# Altium PCB PCB_DCMotor.PcbDoc (part 2 of 2)
Units mm, origin at the board's own origin, x right, y up, seen from the top; angles counter-clockwise.
Board outline 135.2 x 115 mm, 2 copper layers (Top Layer, Bottom Layer); 232 components, 119 nets, 709 pads, 158 vias.
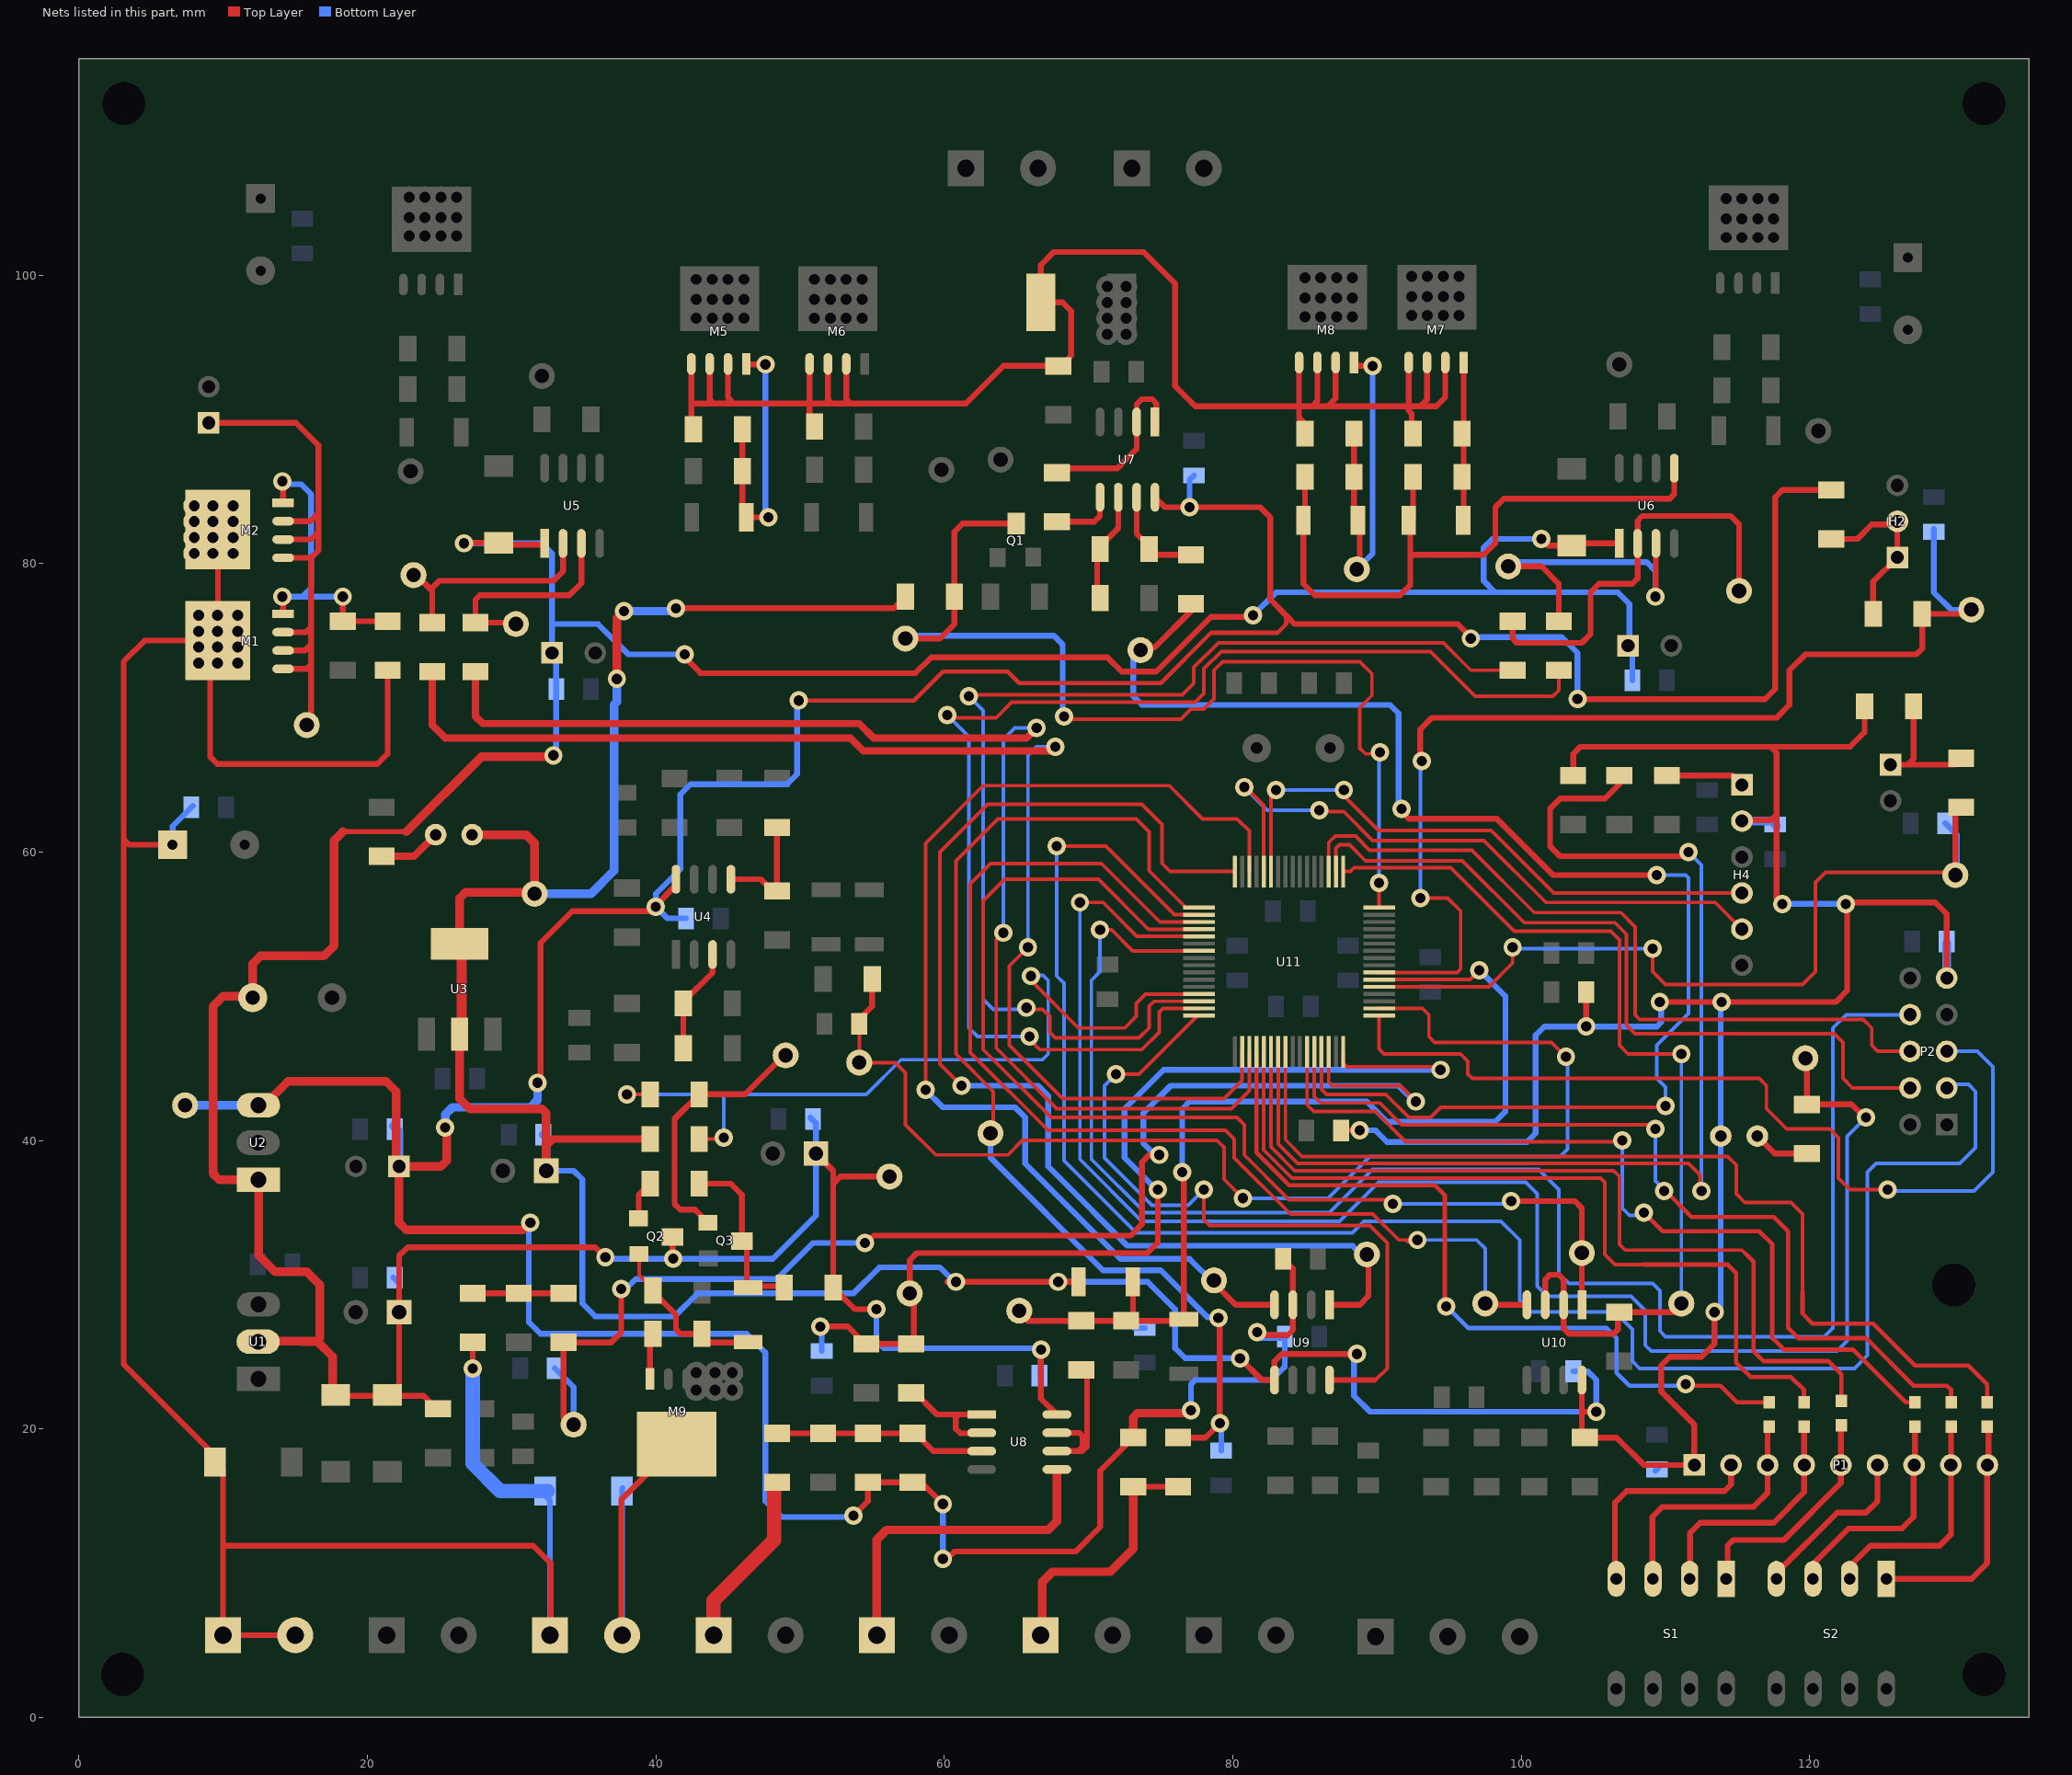
[diagram p2: the nets of this part, all layers, seen from the top]

## Via types
v1: diameter 1.27, hole 0.711, Top Layer to Bottom Layer, 158 vias

## Nets (pads, with @x,y where several pads share a name; then routed paths per layer and width w, separated by ;. In a path a pad name is that pad's centre, name@x,y a point inside that pad or via, vN(x,y) a via of type N, cw(c..) or ccw(c..) an arc to the next point about the centre after c; other vN are vias at no path point) (continued)
NetD11_1: D11.1 M8.4 R19.1 R28.2 T11.1 | length 26
  Top Layer w0.4: R28.2@88.399,89 R19.1@88.399,86 88.399,83.101 88.8,82.7 88.8,80 T11.1@88.4,79.6 ; M8.4@88.405,93.939 88.644,93.7 v1(89.7,93.7)
  Bottom Layer w0.4: T11.1@88.4,79.4 89.7,80.7 v1(89.7,93.7)
NetD11_2: D11.2 D12.2 R19.2 R26.2 U6.5 | length 47.3
  Top Layer w0.4: D11.2@84.898,83 84.898,78.602 85.7,77.8 91.6,77.8 92.3,78.5 92.3,80.6 ; D11.2@84.9,82.7 85.001,82.801 R19.2@85.001,86 ; D12.2@92,82.6 D12.2@92.3,82.9 ; D12.2@92.3,83.1 D12.2@92.3,82.9 ; R26.2@92.501,86 92.501,83.101 D12.2@92.3,82.9 ; U6.5@110.605,86.607 110.605,84.805 110.3,84.5 98.8,84.5 98.2,83.9 98.2,81.4 97.4,80.6 92.3,80.6 ; 92.3,80.6 D12.2@92.3,82.9
NetD12_1: D12.1 M7.4 R26.1 R27.2 | length 11.2
  Top Layer w0.4: D12.1@95.9,82.8 96,82.8 96.005,82.805 M7.4@96.005,93.939
NetD13_1: D13.1 M5.4 R25.1 R29.2 | length 19.5
  Top Layer w0.4: R29.2@45.999,89.3 R25.1@45.999,86.4 45.999,83.701 D13.1@46.4,83.3 ; M5.4@46.27,93.839 46.309,93.8 v1(47.6,93.8) ; D13.1@46.277,83.2 v1(47.8,83.2)
  Bottom Layer w0.4: v1@47.6,83.3 v1(47.6,93.8)
NetD16_1: D16.1 J10.2 M9.5 | length 25.2
  Top Layer w0.4: J10.2@37.6,5.5 37.6,15.09 M9.5@41.449,18.939
  Bottom Layer w0.4: J10.2@37.667,5.7 37.667,15.867 D16.1@37.7,15.9
NetD17_1: D17.1 Q2.2 R74.2 R76.1 | length 11.9
  Top Layer w0.25: Q2.2@38.833,32.132 38.833,30.667 R76.1@39.9,29.6 ; R76.1@39.8,29.5 R76.1@39.9,29.5
  Top Layer w0.4: R76.1@39.8,29.5 41.4,27.9 41.4,26.9 41.7,26.6 R74.2@43.199,26.6 43.799,26 D17.1@46.6,26
NetD17_2: D17.2 Q3.3 R78.2 R79.1 | length 12.4
  Top Layer w0.4: R79.1@42.999,37 45.2,37 45.963,36.237 Q3.3@45.963,33.018 46.3,32.68 46.3,29.9 R78.2@48.9,29.9
NetH1_1: H1.1 M1.1 M1.2 M1.3 M2.1 M2.2 M2.3 T5.1 | length 42
  Top Layer w0.4: H1.1@9,89.75 15.05,89.75 16.6,88.2 16.6,83.7 ; M1.1@14.161,72.695 15.795,72.695 16.1,73 ; M1.2@14.161,73.965 15.665,73.965 16.1,74.4 ; M1.3@14.161,75.235 15.735,75.235 16.1,75.6 ; M2.1@14.161,80.395 16,80.395 ; M2.2@14.161,81.665 16.065,81.665 16.6,82.2 ; M2.3@14.161,82.935 16.035,82.935 16.6,83.5 ; T5.1@15.6,68.6 16.1,69.1 16.1,73 ; 16,80.395 16.1,80.295 16.1,75.6 ; 16,80.395 16.095,80.395 16.6,80.9 16.6,82.2 ; 16.1,73 16.1,74.4 ; 16.1,74.4 16.1,75.6 ; 16.6,82.2 16.6,83.5 ; 16.6,83.5 16.6,83.7 ; 16.6,83.5 16.6,83.7
NetH2_1: H2.1 H2.2 R39.1 R43.2 | length 12.6
  Top Layer w0.4: R39.1@121.5,81.701 123.301,81.701 124.3,82.7 126,82.7 H2.2@126.2,82.9 ; R43.2@124.401,76.5 124.401,78.746 H2.1@126.075,80.42 126.075,82.875 H2.2@126.3,83.1
NetH3_1: H3.1 R42.1 R45.2 | length 9.5
  Top Layer w0.4: H3.1@125.6,66.05 126.8,66.05 ; R42.1@127.199,70.1 127.199,66.449 126.8,66.05 ; R45.2@130.7,66.6 130.15,66.05 126.8,66.05
NetH4_1: H4.1 R69.2 | length 5.5
  Top Layer w0.4: R69.2@110.1,65.299 114.651,65.299 H4.1@115.3,64.65
NetJ5_1: J5.1 R41.2 R44.2 | length 18.7
  Top Layer w0.4: R41.2@73.1,16.001 R44.2@76.2,16.001 R44.2@76.599,16.001
  Top Layer w0.6: J5.1@66.6,5.8 66.8,6 66.8,9.4 67.5,10.1 71.5,10.1 73.1,11.7 R41.2@73.1,16.001
NetJ6_1: J6.1 R51.2 | length 12.4
  Top Layer w1: J6.1@44,5.7 44,8.1 48.2,12.3 48.2,15.9 R51.2@48.5,16.2
NetJ7_1: J7.1 U8.5 | length 23.3
  Top Layer w0.6: J7.1@55.1,5.7 55.3,5.9 55.3,12.3 56,13 67.2,13 67.807,13.607 U8.5@67.807,17.195
NetLD1_2: LD1.2 R71.1 | length 4.4
  Top Layer w0.5: R71.1@21,59.701 23.231,59.701 LD1.2@24.73,61.2
NetLD2_2: LD2.2 R72.1 | length 3.9
  Top Layer w0.4: LD2.2@116.37,40.3 117.569,39.101 R72.1@119.8,39.101
NetM1_4: M1.4 M2.4 R13.2 R14.1 | length 22.2
  Top Layer w0.4: v1(14.1,77.7) 14.161,77.639 M1.4@14.161,76.505 ; v1(14.1,85.7) 14.161,85.639 M2.4@14.161,84.205 ; R14.1@18.3,75.9 R14.1@18.3,75.999 ; v1(18.3,77.7) R14.1@18.3,75.999 ; R13.2@21.4,75.999 R14.1@18.3,75.999
  Bottom Layer w0.4: v1@13.9,85.8 14,85.8 14.3,85.5 15.4,85.5 16.1,84.8 16.1,78.3 15.5,77.7 ; v1(14.1,77.7) 15.1,77.7 ; v1(18.3,77.7) 15.5,77.7 ; 15.1,77.7 15.5,77.7 ; 15.1,77.7 15.5,77.7
NetM5_1: M5.1 M5.2 M5.3 M6.1 M6.2 M6.3 M7.1 M7.2 M7.3 M8.1 M8.2 M8.3 R27.1 R28.1 R29.1 R30.1 R31.2 R34.2 | length 116
  Top Layer w0.4: M5.1@42.46,93.839 42.46,91.1 ; R29.1@42.601,89.3 42.46,89.441 42.46,91.1 ; M5.2@43.73,93.839 43.73,91.37 44,91.1 ; M5.3@45,93.839 45,91.5 45.2,91.3 ; M6.1@50.66,93.839 50.66,91.1 ; R30.1@51.2,89.7 50.66,90.24 50.66,91.1 ; M6.2@51.93,93.839 51.93,91.37 52.2,91.1 ; M6.3@53.2,93.839 53.2,91.4 53.5,91.1 ; R31.2@67.9,93.5 68.8,94.4 68.8,97.5 68.2,98.1 R34.2@66.7,98.1 66.7,100.7 67.6,101.6 73.8,101.6 76,99.4 76,92.3 77.4,90.9 84.595,90.9 ; R31.2@67.9,93.699 64.099,93.699 61.5,91.1 53.5,91.1 ; M8.1@84.595,93.939 84.595,90.9 ; R28.1@85.3,88.9 85.1,89.1 85.1,89.6 84.595,90.105 84.595,90.9 ; M8.2@85.865,93.939 85.865,91.265 85.5,90.9 ; M8.3@87.135,93.939 87.135,91.435 86.6,90.9 ; M7.1@92.195,93.939 92.195,90.9 ; R27.1@92.4,89 92.4,90.4 92.195,90.605 92.195,90.9 ; M7.2@93.465,93.939 93.465,91.365 93,90.9 ; M7.3@94.735,93.939 94.735,91.535 94.1,90.9 93,90.9 ; 42.46,91.1 44,91.1 ; 44,91.1 50.66,91.1 ; 50.66,91.1 52.2,91.1 ; 52.2,91.1 53.5,91.1 ; 84.595,90.9 85.5,90.9 ; 85.5,90.9 86.6,90.9 ; 86.6,90.9 91.7,90.9 ; 91.7,90.9 91.9,90.9 ; 91.7,90.9 91.9,90.9 ; 91.9,90.9 92.1,90.9 ; 92.1,90.9 92.195,90.9 ; 92.1,90.9 92.195,90.9 ; 92.195,90.9 93,90.9
NetM9_4: M9.4 R74.1 | length 3.1
  Top Layer w0.4: M9.4@39.595,23.461 39.595,26.295 R74.1@39.8,26.5
NetP1_2: P1.2 S1.4 | length 15.5
  Top Layer w0.4: S1.4@106.5,9.3 106.5,14.9 107.3,15.7 114.1,15.7 114.54,16.14 P1.2@114.54,17.5
NetP1_3: P1.3 R53.2 S1.3 | length 17.7
  Top Layer w0.4: S1.3@109.1,9.5 109.1,13.9 109.8,14.6 116.1,14.6 117.08,15.58 P1.3@117.08,17.5 117.08,20.034 R53.2@117.2,20.154
NetP1_4: P1.4 R56.2 S1.2 | length 17.2
  Top Layer w0.4: S1.2@111.7,9.3 111.7,12.8 112.4,13.5 117.5,13.5 119.62,15.62 P1.4@119.62,17.5 119.62,20.08 R56.2@119.5,20.2
NetP1_5: P1.5 R59.2 S1.1 | length 16.5
  Top Layer w0.4: S1.1@114.3,9.3 114.3,11.9 114.7,12.3 118.2,12.3 122.16,16.26 P1.5@122.16,17.5 R59.2@122.16,20.46
NetP1_6: P1.6 S2.4 | length 12
  Top Layer w0.4: S2.4@117.8,9.5 117.8,10.1 121.9,14.2 123.9,14.2 124.7,15 P1.6@124.7,17.5
NetP1_7: P1.7 R50.2 S2.3 | length 15.8
  Top Layer w0.4: S2.3@120.23,9.61 120.23,10.63 122.7,13.1 126.4,13.1 127.2,13.9 127.2,17.6 127.3,17.7 127.3,20.2 R50.2@127.2,20.3
NetP1_8: P1.8 R49.2 S2.2 | length 16.4
  Top Layer w0.4: S2.2@122.77,9.61 122.77,10.47 124.2,11.9 129,11.9 129.8,12.7 R49.2@129.8,20.3
NetP1_9: P1.9 R48.2 S2.1 | length 17.2
  Top Layer w0.4: S2.1@125.31,9.61 131.21,9.61 132.3,10.7 132.3,17.6 132.4,17.7 132.4,20.3 R48.2@132.3,20.4
NetQ2_1: Q2.1 R79.2 | length 2.9
  Top Layer w0.4: Q2.1@38.808,34.605 38.808,36.208 R79.2@39.7,37.1
NetQ3_1: Q3.1 R75.2 T37.1 | length 18.5
  Top Layer w0.4: Q3.1@43.608,34.305 42.713,35.2 41.7,35.2 41.3,35.6 41.3,41.501 R75.2@42.999,43.2 46.2,43.2 T37.1@49.1,46.1
NetR4_1: R4.1 R6.1 U4.5 | length 7.9
  Top Layer w0.4: U4.5@45.205,58.107 47.293,58.107 R4.1@48.2,57.2 ; R4.1@48.4,57.2 R6.1@48.4,61.701
NetR5_2: R5.2 R7.2 U4.3 | length 7.7
  Top Layer w0.4: R7.2@41.9,46.2 41.8,46.2 41.901,46.301 R5.2@41.901,49.5 41.901,49.601 43.935,51.635 U4.3@43.935,52.893
NetR21_1: R21.1 T12.1 U5.2 | length 15.7
  Top Layer w0.4: T12.1@23.3,79.3 24.5,78.1 ; R21.1@24.6,75.8 R21.1@24.5,75.899 24.5,78.1 ; U5.2@33.565,81.393 33.565,79.465 32.9,78.8 25,78.8 24.5,78.3 24.5,78.1
NetR22_1: R22.1 T13.1 U5.3 | length 15.1
  Top Layer w0.4: T13.1@30.4,75.7 30.201,75.899 R22.1@27.5,75.899 27.5,77.5 27.8,77.8 34,77.8 34.835,78.635 U5.3@34.835,81.393
NetR23_1: R23.1 T14.1 U6.2 | length 29.6
  Top Layer w0.4: R23.1@99.4,75.999 99.4,74.8 99.7,74.5 104.2,74.5 104.8,75.1 104.8,78 105.4,78.6 107.7,78.6 108.065,78.965 U6.2@108.065,81.393 108.065,82.965 108.4,83.3 114.5,83.3 115.1,82.7 T14.1@115.1,78.1
NetR24_1: R24.1 T15.1 U6.3 | length 24.8
  Top Layer w0.4: T15.1@99.1,79.8 101.4,79.8 102.6,78.6 R24.1@102.6,75.999 ; v1(109.3,77.7) 109.335,77.735 U6.3@109.335,81.393 109.335,79.135
  Bottom Layer w0.4: T15.1@99.1,80.1 108.7,80.1 109.3,79.5 v1(109.3,77.7)
NetR32_1: R32.1 U7.5 | length 4.4
  Top Layer w0.4: R32.1@67.9,82.901 70.401,82.901 70.795,83.295 U7.5@70.795,84.593
NetR32_2: R32.2 U7.1 U7.2 | length 12.9
  Top Layer w0.4: R32.2@67.7,86.6 72,86.6 73.335,87.935 U7.2@73.335,89.807 73.335,91.035 73.7,91.4 74.4,91.4 74.7,91.1 74.7,89.3 U7.1@74.6,89.2
NetR33_2: R33.2 R35.1 U7.7 | length 7.2
  Top Layer w0.4: U7.7@73.335,84.593 73.335,82.065 74.8,80.6 R33.2@77.4,80.6
NetR35_2: R35.2 R37.2 U7.6 | length 7.8
  Top Layer w0.4: R37.2@71.1,77.6 70.6,78.1 70.6,81 72.065,82.465 U7.6@72.065,84.593
NetR40_1: R40.1 R46.2 R47.1 | length 6.5
  Top Layer w0.4: R40.1@27.3,29.399 R47.1@30.5,29.399 R46.2@33.6,29.399 R46.2@33.699,29.399 ; R46.2@33.7,29.4 R46.2@33.8,29.4
NetR51_1: R51.1 R52.2 R54.2 R57.2 U8.3 | length 14.9
  Top Layer w0.4: R51.1@48.4,19.699 R57.2@51.6,19.699 R54.2@54.7,19.699 R52.2@57.8,19.699 R52.2@58,19.699 ; R52.2@58.2,19.6 58.101,19.699 R52.2@58,19.699 ; U8.3@62.593,18.465 59.234,18.465 R52.2@58,19.699
NetR55_2: R55.2 U8.1 U8.2 | length 8.5
  Top Layer w0.4: R55.2@57.8,22.7 59.495,21.005 61.005,21.005 ; U8.2@62.593,19.7 61.1,19.7 60.8,20 60.8,20.8 61.005,21.005 ; U8.1@62.593,21.005 61.005,21.005
NetR60_2: R60.2 U8.6 U8.7 | length 10.9
  Top Layer w0.4: U8.6@67.807,18.465 69.265,18.465 ; U8.7@67.807,19.735 69.365,19.735 69.6,19.5 69.6,18.8 69.265,18.465 ; R60.2@69.6,24.2 69.7,24.2 69.9,24 69.9,18.8 69.565,18.465 69.265,18.465
NetR73_1: R73.1 U11.7 | length 80.5
  Top Layer w0.25: U11.7@83.15,46.15 83.15,39.75 83.8,39.1 84.5,38.4 111.6,38.4 112.4,37.6 v1@112.4,36.4
  Top Layer w0.4: R73.1@106.8,65.299 106.8,64.7 105.8,63.7 102.7,63.7 102,63 102,60.4 102.7,59.7 111.3,59.7 v1(111.6,60)
  Bottom Layer w0.25: v1@111.5,60.1 v1(111.6,60) 112.5,59.1 112.5,57.6 v1(112.5,36.5)
PGC: H4.5 U11.44 | length 45
  Top Layer w0.25: v1@80.9,64.5 82.15,63.25 U11.44@82.15,58.65 ; v1(86,62.9) 86.1,62.8 87.7,62.8 89.7,60.8 97.4,60.8 101.7,56.5 113.45,56.5 H4.5@115.3,54.65
  Bottom Layer w0.25: v1(80.8,64.5) 82.4,62.9 v1(86,62.9) v1@86.1,62.9
PGD: H4.4 U11.43 | length 41.6
  Top Layer w0.25: U11.43@82.65,58.65 82.65,63.95 v1(83,64.3) ; v1@87.5,64.3 87.5,64.1 90.1,61.5 97.9,61.5 98.1,61.3 102.25,57.15 H4.4@115.3,57.15 ; v1@87.75,64.35 v1@87.9,64.2
  Bottom Layer w0.25: v1(83,64.3) v1(87.7,64.3)
RST: P2.8 U11.55 | length 118.8
  Top Layer w0.2: 73.45,53.15 U11.55@77.65,53.15
  Top Layer w0.25: v1@70.6,54.6 v1(70.8,54.6) 71.6,54.6 73.05,53.15 U11.55@77.65,53.15
  Bottom Layer w0.25: v1(70.8,54.6) 70.8,51.7 70.2,51.1 70.2,38.7 73.9,35 86.7,35 89.7,38 101.2,38 102.6,36.6 102.6,30.8 103.3,30.1 109.1,30.1 109.609,29.591 109.609,26.791 110,26.4 121,26.4 121.6,27 121.6,30.9 121.6,47.8 122.52,48.72 P2.8@126.96,48.72
SCK: P2.6 U11.35 | length 53.2
  Top Layer w0.25: U11.35@86.65,58.65 86.65,60.65 87.1,61.1 88.5,61.1 89.482,60.118 96.582,60.118 100.9,55.8 106.9,55.8 107.9,54.8 107.9,48.7 108.2,48.4 120.7,48.4 123.7,48.4 124.3,47.8 124.3,46.6 124.7,46.2 126.9,46.2 P2.6@127.1,46
SI: P2.5 U11.17 | length 63.6
  Top Layer w0.25: U11.17@90.15,48.65 90.15,46.35 90.5,46 95.8,46 96.3,45.5 96.3,44.6 96.6,44.3 116.5,44.3 117,43.8 117,42.2 118.4,40.8 121.4,40.8 122,40.2 122,37.4 122.8,36.6 v1(125.4,36.6)
  Bottom Layer w0.25: v1@125.3,36.5 131.4,36.5 132.7,37.8 132.7,45.1 131.62,46.18 P2.5@129.5,46.18
SO: P2.4 U11.34 | length 53.7
  Top Layer w0.25: U11.34@87.15,58.65 87.15,60.25 87.4,60.5 88.1,60.5 89.2,59.4 95.9,59.4 100.2,55.1 106.5,55.1 107.3,54.3 107.3,48 107.9,47.4 121.7,47.4 122.3,46.8 122.3,44.3 122.96,43.64 P2.4@126.96,43.64
UC_BACK_EMF: C11.1 R9.2 T4.1 U11.18 | length 86.4
  Top Layer w0.25: T4.1@54,45.3 54.102,45.402 C11.1@54.102,48.1 ; T4.1@54.1,45.4 56.6,45.4 57.3,44.7 57.3,41.1 59.4,39 64.4,39 65.4,40 78.9,40 79.388,39.512 79.388,37.312 v1(80.7,36) ; U11.18@90.15,49.15 93.15,49.15 93.6,48.7 93.6,47.2 94,46.8 97.1,46.8 102.1,46.8 v1(103.1,45.8)
  Top Layer w0.4: C11.1@54,48.3 54.999,49.299 R9.2@54.999,51.2
  Bottom Layer w0.25: v1(80.7,36) 86.6,36 89.5,38.9 102.7,38.9 103.2,39.4 103.2,45.7 v1(103.1,45.8)
UC_BUS_CURRENT: R33.1 T17.1 U11.13 | length 103.9
  Top Layer w0.25: U11.13@86.15,46.15 86.15,43.55 86.5,43.2 90.6,43.2 92.2,41.6 93.7,41.6 94.4,42.3 109.9,42.3 v1@110,42.2
  Top Layer w0.4: T17.1@73.1,74.2 74.6,74.2 77.1,76.7 R33.1@77.1,77.201 ; v1@91.5,63 92.2,62.3 98.3,62.3 102.2,58.4 v1(109.4,58.4)
  Bottom Layer w0.25: v1(109.4,58.4) 111.4,58.4 111.6,58.2 111.6,54.5 ; v1(110,42.4) 110,43.7 109.4,44.3 109.4,46.6 111.6,48.8 111.6,54.5 ; 111.6,57.1 111.6,54.5
  Bottom Layer w0.4: T17.1@73.3,74.2 73.1,74 73.1,70.8 73.7,70.2 90.9,70.2 91.5,69.6 v1@91.5,62.9
  other v1: 91.7,63
UC_CAN_RXD: T32.1 U9.4 U11.46 | length 77.6
  Top Layer w0.25: v1@58.7,43.4 v1(58.7,43.5) 58.7,60.6 62.7,64.6 75.6,64.6 77.9,62.3 80.3,62.3 81.15,61.45 U11.46@81.15,58.65
  Top Layer w0.4: T32.1@78.7,30.1 80.193,28.607 U9.4@82.895,28.607
  Bottom Layer w0.4: v1(58.7,43.5) 59.9,42.3 64.9,42.3 65.6,41.6 65.6,38.4 67.2,36.8 72.2,31.8 77,31.8 T32.1@78.7,30.1
UC_CAN_TXD: T31.1 U9.1 U11.48 | length 84.7
  Top Layer w0.25: v1@60.9,43.7 61.3,43.7 59.7,45.3 59.7,60 63,63.3 73.7,63.3 75.087,61.913 75.087,59.213 75.65,58.65 U11.48@80.15,58.65
  Top Layer w0.4: U9.1@86.705,28.607 88.807,28.607 89.4,29.2 T31.1@89.4,32.3
  Bottom Layer w0.4: v1(61.2,43.8) 66.5,43.8 67.2,43.1 67.2,38.2 67.842,37.558 72.7,32.7 88.3,32.7 88.9,32.1 T31.1@89.3,31.7
UC_COM_DIRECTION: R67.2 T34.1 U10.2 U10.3 U11.33 | length 67.5
  Top Layer w0.25: U11.33@87.65,58.65 88.15,58.65 88.4,58.9 95.1,58.9 99.5,54.5 106.2,54.5 106.8,53.9 106.8,46.6 107.4,46 v1(111.1,46)
  Top Layer w0.4: U10.3@101.665,28.607 101.665,30.365 102,30.7 102.6,30.7 102.935,30.365 U10.2@102.935,28.607 102.935,26.965 103.3,26.6 106.4,26.6 106.7,26.9 106.7,28.2 R67.2@106.6,28.3 ; R67.2@106.8,28.099 110.599,28.099 T34.1@111.3,28.8
  Bottom Layer w0.25: T34.1@111.1,28.624 v1(111.1,46)
UC_FAULT_CURRENT: Q1.3 R36.1 T18.1 U11.32 | length 75.2
  Top Layer w0.25: v1@68.2,69.4 68.4,69.2 72.6,69.2 ; 71.2,69.2 72.6,69.2 ; U11.32@90.15,56.15 v1(90.15,57.85) ; v1@90.5,66.8 89.2,66.8 88.8,67.2 88.8,70 89.647,70.847 89.647,72.353 88.8,73.2 79.3,73.2 78.7,72.6 78.7,70.6 78,69.9 77.1,69.9 76.4,69.2 72.6,69.2
  Top Layer w0.4: T18.1@57.3,74.8 59.7,74.8 60.699,75.799 R36.1@60.699,77.7 R36.1@60.699,77.8 ; R36.1@60.8,77.699 R36.1@60.699,77.8 ; Q1.3@64.982,82.763 61.263,82.763 60.699,82.199 R36.1@60.699,77.8
  Bottom Layer w0.25: v1(90.15,57.85) v1@90.15,66.85
  Bottom Layer w0.4: T18.1@57.6,74.6 58,75 67.6,75 68.2,74.4 v1@68.2,69.3
  other v1: 90.2,66.9 68.3,69.4
UC_HALL_INPUT: C29.1 R44.1 T20.1 U11.49 | length 78
  Top Layer w0.25: T20.1@63.4,40.3 63.4,43.4 60.8,46 60.8,59.4 63.7,62.3 73.3,62.3 74.2,61.4 74.2,58.7 76.75,56.15 U11.49@77.65,56.15
  Top Layer w0.4: R44.1@76.2,19.399 78.099,19.399 v1(79.1,20.4) 79.1,27.6 v1(79,27.7)
  Bottom Layer w0.4: T20.1@63.2,40.8 63.2,38.8 71,31 75,31 78.25,27.75 v1@79.05,27.75 ; v1(79.1,20.4) 79.2,20.3 C29.1@79.2,18.502 ; v1@79.2,27.5 79.3,27.5 v1@79.141,27.659 ; v1@79.05,27.75 v1@79.141,27.659 ; v1@79.05,27.75 v1@79.141,27.659
UC_HB_LED1: R72.2 T36.1 U11.53 | length 117.5
  Top Layer w0.25: v1(69.4,56.5) 71,56.5 73.35,54.15 U11.53@77.65,54.15
  Top Layer w0.4: T36.1@119.7,45.7 119.8,45.6 R72.2@119.8,42.499 122.901,42.499 v1@123.9,41.5
  Bottom Layer w0.25: v1(69.4,56.5) 69.4,38.7 73.7,34.4 87.4,34.4 90.1,37.1 100.3,37.1 101.1,36.3 101.1,29.9 101.8,29.2 107.6,29.2 108.6,28.2 108.6,25.8 109,25.4 121.9,25.4 122.6,26.1 122.6,29.8 ; 122.6,30.1 122.6,29.8 ; v1(123.9,41.6) 122.6,40.3 122.6,29.8
UC_INPUT_VOLTAGE: C31.1 R46.1 T22.1 U11.14 | length 93.8
  Top Layer w0.25: U11.14@86.65,46.15 86.65,44.05 86.9,43.8 91.6,43.8 v1(92.7,42.7)
  Top Layer w0.4: T22.1@34.3,20.1 33.6,20.8 R46.1@33.6,26.001 36.901,26.001 37.6,26.7 v1(37.6,29.7) ; v1(54.5,32.9) 54.6,32.9 55.1,33.4 72.9,33.4 73.7,34.2 73.7,38.5 74.2,39 v1@74.7,39
  Bottom Layer w0.4: C31.1@33.002,24.2 34.3,22.902 T22.1@34.3,20.3 ; v1@37.7,29.5 38.6,30.4 48.4,30.4 50.9,32.9 v1(54.5,32.9) ; v1@74.8,38.8 73.8,39.8 73.8,41.9 75.7,43.8 91.5,43.8 v1@92.7,42.6
  other v1: 74.9,39
UC_INTERNAL_TEMP: C30.1 R45.1 T21.1 U11.21 | length 59.7
  Top Layer w0.25: U11.21@90.15,50.65 97.75,50.65 99.4,52.3 v1(99.4,53.4) ; v1(109.1,53.3) 109.1,51.7 110,50.8 119.5,50.8 120.4,51.7 120.4,57.9 121.1,58.6 130.1,58.6 T21.1@130.4,58.6
  Top Layer w0.4: T21.1@130.1,58.6 130.1,62.7 R45.1@130.6,63.2
  Bottom Layer w0.25: v1@99.4,53.3 v1(109.1,53.3)
  Bottom Layer w0.4: C30.1@129.402,62 130.1,61.302 130.1,61.3 130.2,61.2 T21.1@130.2,58.3
UC_PLC_ANALOG_INPUT: C34.2 R55.1 R58.2 T26.1 U11.16 | length 73.4
  Top Layer w0.25: U11.16@87.65,46.15 87.65,45.35 87.9,45.1 94.2,45.1 v1@94.5,44.8
  Top Layer w0.4: v1(51.4,27.1) 53.3,27.1 R58.2@54.5,25.9 ; R58.2@54.6,25.899 R55.1@57.7,25.899 R55.1@57.899,25.899 ; R55.1@57.9,25.9 57.9,29.1 T26.1@57.6,29.4 57.6,31.7 58.1,32.2 74.1,32.2 74.8,32.9 v1(74.8,36.6)
  Bottom Layer w0.4: v1(51.4,27.1) 51.5,27 C34.2@51.5,25.402 ; v1@74.75,36.55 72.5,38.8 72.5,42.2 75.2,44.9 v1(94.4,44.9)
UC_POT_INPUT: C28.1 R43.1 T19.1 U11.23 | length 76.9
  Top Layer w0.25: U11.23@90.15,51.65 95.55,51.65 95.8,51.9 95.8,55.9 94.9,56.8 v1(93,56.8) v1@92.9,56.8
  Top Layer w0.4: v1@93,66.3 93,68.5 93.8,69.3 117.7,69.3 118.6,70.2 118.6,72.6 119.7,73.7 127.4,73.7 127.799,74.099 R43.1@127.799,76.5 131,76.5 T19.1@131.3,76.8
  Bottom Layer w0.25: v1(93,56.8) 93,66.3 v1@93.1,66.4
  Bottom Layer w0.4: C28.1@128.6,82.4 C28.1@128.6,82.198 128.6,78 129.8,76.8 T19.1@131.2,76.8
  other v1: 93.1,66.3
UC_PWM_A: R21.2 U11.2 | length 90.8
  Top Layer w0.25: v1(65.8,53.4) 64.5,52.1 64.5,46.6 68.2,42.9 79.4,42.9 80.65,44.15 U11.2@80.65,46.15
  Top Layer w0.5: R21.2@24.5,72.501 24.5,68.8 25.4,67.9 53.5,67.9 54.4,67 67.4,67 v1(67.7,67.3)
  Bottom Layer w0.25: v1(65.8,53.4) 65.8,66.7 66.4,67.3 v1(67.7,67.3)
UC_PWM_A_BAR: R22.2 U11.3 | length 90.2
  Top Layer w0.25: v1(64.1,54.4) 63.6,53.9 63.6,46.4 67.8,42.2 79.9,42.2 81.15,43.45 U11.3@81.15,46.15
  Top Layer w0.5: R22.2@27.5,72.501 27.5,69.4 28,68.9 54.1,68.9 55.1,67.9 65.7,67.9 v1@66.3,68.5 ; v1@66.4,68.4 v1@66.3,68.5 ; v1(66.4,68.6) v1@66.3,68.5
  Bottom Layer w0.25: v1(64.1,54.4) 64.1,67.8 64.9,68.6 v1(66.4,68.6) 66.5,68.6 v1@66.3,68.8
UC_PWM_B: R23.2 U11.62 | length 80.6
  Top Layer w0.25: v1@62,70.9 76.5,70.9 77.3,71.7 77.3,72.8 79,74.5 94.6,74.5 96.499,72.601 R23.2@99.4,72.601 ; v1@65.6,49.2 65.7,49.1 66.8,49.1 67.3,48.6 67.3,47.5 67.7,47.1 73.5,47.1 74.2,47.8 74.2,49.3 74.55,49.65 U11.62@77.65,49.65
  Bottom Layer w0.25: v1(61.7,70.8) 62.7,69.8 62.7,49.8 63.4,49.1 v1@65.8,49.1
  other v1: 65.7,49.2
UC_PWM_B_BAR: R24.2 U11.63 | length 89.5
  Top Layer w0.25: v1@59.9,69.5 60.1,69.3 63.6,69.3 64.675,70.375 77.375,70.375 78,71 78,72.7 79.2,73.9 93.7,73.9 96.8,70.8 102.2,70.8 102.6,71.2 R24.2@102.6,72.601 ; v1@65.8,47.1 66.6,46.3 73.7,46.3 74.9,47.5 74.9,48.9 75.15,49.15 U11.63@77.65,49.15
  Bottom Layer w0.25: v1(60.2,69.5) 61.7,68 61.7,47.8 62.3,47.2 v1(65.9,47.2)
UC_PWM_DB: R75.1 R77.1 U11.61 | length 58.2
  Top Layer w0.25: v1(38,43.2) R75.1@39.601,43.2 ; R77.1@42.999,40.1 44.6,40.1 v1(44.7,40.2) ; v1@66,51.6 v1(66,51.4) 66,51.1 69.3,47.8 72.5,47.8 73.3,48.6 73.3,49.5 73.95,50.15 U11.61@77.65,50.15
  Bottom Layer w0.25: v1(38,43.2) 44.5,43.2 ; v1(44.7,40.2) 44.7,43 44.5,43.2 ; v1@66.05,51.45 66.85,51.45 67.2,51.1 67.2,46 66.8,45.6 57,45.6 54.6,43.2 44.5,43.2
UC_RXD: T33.1 U10.1 U11.52 | length 81.6
  Top Layer w0.25: U11.52@77.65,54.65 74.15,54.65 70.7,58.1 64.2,58.1 62.7,56.6 62.7,46.3 67.4,41.6 80.3,41.6 80.8,41.1 80.8,39 83.9,35.9 90.8,35.9 v1(91.1,35.6)
  Top Layer w0.4: v1(99.3,35.8) 103.7,35.8 104.2,35.3 T33.1@104.2,32.2 ; T33.1@104.1,32.3 T33.1@104.2,32.2 ; U10.1@104.205,28.607 104.205,32.195 T33.1@104.2,32.2
  Bottom Layer w0.25: v1(91.1,35.6) 99,35.6 v1@99.3,35.9
UC_SILENT_MODE: U9.8 U11.64 | length 50.8
  Top Layer w0.25: v1(71.9,44.6) 73.5,44.6 77.55,48.65 U11.64@77.65,48.65 ; v1(78,36.6) 78,34.5 78.4,34.1 89.5,34.1 90.7,32.9 90.7,24.2 89.893,23.393 89.8,23.393
  Top Layer w0.4: U9.8@86.705,23.393 89.8,23.393
  Bottom Layer w0.25: v1(71.9,44.6) 71.1,43.8 71.1,38.8 74.4,35.5 76.9,35.5 v1(78,36.6)
UC_SWITCH_INPUT1: R48.1 U11.8 | length 68.2
  Top Layer w0.25: U11.8@83.65,46.15 83.65,40.05 84.8,38.9 114.3,38.9 114.9,38.3 114.9,36.3 115.5,35.7 118.7,35.7 119.5,34.9 119.5,29.5
  Top Layer w0.3: 119.5,29.5 119.5,28 120.2,27.3 124.4,27.3 127.3,24.4 131,24.4 132.3,23.1 R48.1@132.3,21.846
UC_SWITCH_INPUT2: R49.1 U11.12 | length 63.8
  Top Layer w0.25: U11.12@85.65,46.15 85.65,43.05 86.1,42.6 88.4,42.6 ; 89.5,42.6 88.4,42.6 ; v1(109.3,40.8) 109,41.1 91.7,41.1 90.2,42.6 88.4,42.6
  Top Layer w0.3: v1(109.9,36.5) 110,36.5 111.8,34.7 117.5,34.7 118.5,33.7 118.5,27 119.2,26.3 123.9,26.3 127.2,23 129.5,23 129.8,22.7 R49.1@129.8,21.846
  Bottom Layer w0.25: v1(109.3,40.8) 109.3,37.2 v1@110,36.5
UC_SWITCH_INPUT3: R50.1 U11.11 | length 61.3
  Top Layer w0.25: U11.11@85.15,46.15 85.15,42.45 85.6,42 89.4,42 ; 89.6,42 89.4,42 ; v1@106.9,39.9 92,39.9 89.9,42 89.4,42
  Top Layer w0.3: v1(108.5,35) 109.8,33.7 116.5,33.7 117.4,32.8 117.4,26.3 118.2,25.5 123,25.5 126.654,21.846 R50.1@127.3,21.846
  Bottom Layer w0.25: v1(107,40) 107,35.3 107.5,34.8 108.5,34.8 v1@108.6,34.9
UC_SWITCH_INPUT4: R53.1 U11.4 | length 55.7
  Top Layer w0.3: U11.4@81.65,46.15 81.65,39.15 83.9,36.9 94,36.9 94.7,36.2 v1@94.7,28.4 ; v1(111.4,23.1) 111.5,23 113.8,23 114.954,21.846 R53.1@117.2,21.846
  Bottom Layer w0.3: v1(94.8,28.5) 96.3,27 105.9,27 106.6,26.3 106.6,23.9 107.5,23 111.3,23 v1(111.4,23.1)
UC_SWITCH_INPUT5: R56.1 U11.5 | length 58.8
  Top Layer w0.25: U11.5@82.15,46.15 82.15,39.35 84.1,37.4 105.5,37.4 105.8,37.1 105.8,32.1 106.5,31.4 108.7,31.4
  Top Layer w0.3: 108.5,31.4 108.7,31.4 114.3,31.4 114.9,30.8 114.9,24.6 115.9,23.6 118.7,23.6 119.6,22.7 R56.1@119.6,21.846
UC_SWITCH_INPUT6: R59.1 U11.6 | length 60.9
  Top Layer w0.25: U11.6@82.65,46.15 82.65,39.55 84.287,37.912 106.387,37.912 106.8,37.5 106.8,32.8 107.2,32.4 115.3,32.4 115.6,32.1
  Top Layer w0.3: 115.6,32.1 116.1,31.6 116.1,25.4 116.8,24.7 121.3,24.7 122.2,23.8 R59.1@122.2,21.946
UC_TACHO_INPUT: C35.1 D14.1 D15.2 R60.1 R61.1 T30.1 U11.22 | length 79.7
  Top Layer w0.25: U11.22@90.15,51.15 96.45,51.15 v1(97.1,51.8)
  Top Layer w0.4: T30.1@65,28.3 65.801,27.499 R60.1@69.5,27.499 R61.1@72.6,27.499 D15.2@76.799,27.499 ; R61.1@73,27.6 73.077,27.677 D14.1@73.077,30.2 ; D15.2@76.6,27.602 v1@76.6,37.7
  Bottom Layer w0.4: T30.1@65.2,28.2 65.9,27.5 72.7,27.5 73.198,27.002 C35.1@73.9,27.002 ; v1(76.5,37.8) 76.5,42.2 77,42.7 89.3,42.7 90.7,41.3 98.2,41.3 98.9,42 98.9,50 v1(97.1,51.8)
UC_TXD: T35.1 U10.4 U11.51 | length 79.7
  Top Layer w0.25: U11.51@77.65,55.15 74.95,55.15 70.9,59.2 63.2,59.2 61.8,57.8 61.8,46.1 67.2,40.7 79.5,40.7 80.1,40.1 80.1,38.8 84,34.9 89.7,34.9 91.5,33.1 92,33.1 ; v1(92.8,33.1) 92,33.1 ; v1@93,33 92.1,33 92,33.1
  Top Layer w0.4: T35.1@97.5,28.7 97.593,28.607 U10.4@100.395,28.607
  Bottom Layer w0.25: v1(92.8,33.1) 96.9,33.1 97.5,32.5 T35.1@97.5,28.7
VCC_3.3V: C7.1 C8.1 C32.1 C39.1 C40.2 C43.2 D14.2 FB1.2 FB3.2 H4.2 LD1.1 LD2.1 P1.1 P2.9 R36.2 R42.2 R68.1 R70.2 R77.2 T1.1 U3.2 U3.4 U9.5 U10.8 | length 365.9
  Top Layer w0.4: U3.2@26.4,47.355 26.4,47.6 26.4,53.4 U3.4@26.6,53.6 ; v1(41.4,76.9) 56.501,76.9 R36.2@57.301,77.7 ; v1@60.2,30.2 v1(60.8,30.2) v1(67.9,30.2) ; D14.2@69.3,30 D14.2@69.1,30.2 ; v1(80.5,24.9) 82.007,23.393 U9.5@82.895,23.393 82.895,24.695 83.4,25.2 v1(88.6,25.2) v1@88.8,25.2 ; FB1.2@87.502,40.7 v1(88.8,40.7) ; R70.2@103.6,65.299 103.6,66.8 104.1,67.3 117.3,67.3 ; U10.8@104.205,23.393 104.205,21.2 ; R68.1@104.4,19.399 106.601,19.399 108.5,17.5 P1.1@112,17.5 112,20.3 109.7,22.6 109.7,24.4 110.3,25 112.5,25 113.4,25.9 v1(113.4,28.1) v1@113.4,28.3 ; R68.1@104.5,19.2 104.205,19.495 104.205,21.2 ; v1(104.5,47.9) 104.502,47.902 FB3.2@104.502,50.3 ; v1@105.2,21.2 104.205,21.2 ; v1(109.6,49.6) v1(113.9,49.6) 121.8,49.6 122.6,50.4 122.6,56.4 v1@122.55,56.45 ; H4.2@115.3,62.2 117.3,62.2 117.7,62.6 ; v1(118.1,56.4) 117.7,56.8 117.7,62.6 ; v1@122.4,56.6 v1@122.55,56.45 ; R42.2@123.801,70.1 123.8,68.3 122.8,67.3 117.3,67.3 ; P2.9@129.5,51.26 129.5,55.7 128.7,56.5 122.6,56.5 v1@122.55,56.45 ; v1(67.9,30.2) D14.2@69.1,30.2 ; v1(67.9,30.2) D14.2@69.1,30.2 ; 117.3,67.3 117.7,66.9 117.7,62.6
  Top Layer w0.5: 32.4,39.6 32.9,40.1 37.9,40.1 R77.2@39.601,40.1
  Top Layer w0.6: U3.2@26.2,47.4 26.4,47.6 26.6,47.8 U3.4@26.6,53.6 ; U3.4@26.39,53.645 26.39,56.79 26.8,57.2 T1.1@31.6,57.2 ; U3.2@26.4,47.355 26.4,42.9 27.1,42.2 32.1,42.2 32.4,41.9 32.4,39.6 C7.1@32.4,37.9 C7.1@32.2,37.7 ; LD1.1@27.27,61.2 31,61.2 31.6,60.6 T1.1@31.6,57.2 ; T1.1@31.6,57.1 T1.1@31.6,57.2 ; T1.1@31.7,57.2 T1.1@31.6,57.2 ; v1(37.3,72) 37.3,76.2 v1(37.8,76.7)
  Bottom Layer w0.4: C7.1@32.4,37.9 34.3,37.9 34.9,37.3 34.9,28.7 35.8,27.8 41.3,27.8 42.9,29.4 53.7,29.4 55.5,31.2 59.7,31.2 60.7,30.2 v1(60.8,30.2) ; v1(67.9,30.2) 74.1,30.2 76,28.3 76,25.6 76.7,24.9 v1(80.5,24.9) ; v1(88.6,25.2) 88.4,25 88.4,22.3 89.5,21.2 v1(105.2,21.2) ; v1(88.8,40.7) 89.9,40.7 90.7,39.9 100.4,39.9 101,40.5 101,47.3 101.6,47.9 v1(104.5,47.9) ; C40.2@103.602,24 104.6,24 105.2,23.4 v1(105.2,21.2) ; v1@105.1,21 105.2,21.1 v1(105.2,21.2) ; C32.1@109.3,17.1 109.7,17.5 P1.1@112,17.5 ; v1@109.7,49.7 109.7,48.2 109.4,47.9 v1@104.7,47.9 ; v1(113.4,28.1) 113.5,28.2 113.8,28.2 113.83,28.23 LD2.1@113.83,40.3 113.83,49.53 v1(113.9,49.6) ; v1(118.1,56.4) v1(122.5,56.4) ; v1(104.5,47.9) v1@104.7,47.9 ; v1(104.5,47.9) v1@104.7,47.9
  Bottom Layer w0.6: T1.1@31.6,57.1 35.5,57.1 37.1,58.7 37.1,70.2 37.3,70.4 v1(37.3,72) ; C8.1@32.202,40.4 32.4,40.202 C7.1@32.4,37.9 ; v1(37.8,76.7) 41.2,76.7 v1(41.4,76.9) v1@41.5,77 ; H4.2@115.3,62.15 117.35,62.15 C43.2@117.7,61.8 ; P2.9@129.5,51.26 C39.1@129.5,53.7
VCC_5V: C1.1 C5.1 C10.2 C26.1 C36.1 C37.1 R39.2 R41.1 R52.1 R54.1 T3.1 U2.3 U4.8 U7.8 U9.3 | length 313.3
  Top Layer w0.3: v1@49.8,70.5 v1(49.9,70.5) 57.9,70.5 59.9,72.5 64.4,72.5 65.2,71.7 75,71.7 78.5,75.2 83.1,75.2 83.7,75.8 83.7,76.4
  Top Layer w0.4: v1@39.9,56.2 41.395,57.695 U4.8@41.395,58.107 ; v1(40,56.2) 39.7,55.9 34.2,55.9 32,53.7 32,45.3 ; v1(53.7,14) 54.7,15 R54.1@54.7,16.301 R52.1@57.8,16.301 58.299,16.301 58.399,16.301 v1(59.9,14.8) ; v1(59.9,11) 60.1,11.2 60.4,11.2 60.7,11.5 69.1,11.5 70.8,13.2 70.8,17.099 R41.1@73.1,19.399 ; U7.8@74.605,84.593 75.298,83.9 v1(77,83.9) 81.9,83.9 82.6,83.2 82.6,77.5 83.7,76.4 84.3,75.8 95.6,75.8 v1@96.6,74.8 ; v1(81.7,26.7) 81.9,26.5 83.8,26.5 84.165,26.865 U9.3@84.165,28.607 84.165,31.135 C37.1@83.4,31.9 ; v1(103.9,70.6) 116.9,70.6 117.6,71.3 117.6,74.4 ; R39.2@121.5,85.099 118.099,85.099 117.6,84.6 117.6,76.8 ; v1@32,44.2 v1(31.8,44) v1@32,44.2 ; v1@32,44.2 32,45.3 ; v1@32,44.2 32,45.3 ; 117.6,74.4 117.6,76.8 ; 117.6,74.4 117.6,76.8
  Top Layer w0.6: U2.3@12.454,42.437 12.837,42.437 14.5,44.1 21.3,44.1 22,43.4 22,38.399 C1.1@22.199,38.2 ; v1(25.4,40.9) 25.5,40.8 25.5,38.6 25.1,38.2 C1.1@22.199,38.2 ; v1(31.3,34.3) 30.8,33.8 22.7,33.8 22.199,34.301 C1.1@22.199,38.2 ; R41.1@73.1,19.399 73.1,20.8 73.4,21.1 76.9,21.1 v1(77.1,21.3) ; C37.1@83.5,32 C37.1@83.6,31.9
  Bottom Layer w0.4: v1@31.3,34.4 31.2,34.3 31.2,27.4 32,26.6 46.3,26.6 47.6,25.3 47.6,15 48.7,13.9 53.6,13.9 v1(53.7,14) ; C10.2@42.098,55.4 40.8,55.4 v1(40,56.2) 40,57.1 41.7,58.8 41.7,64 42.4,64.7 49.1,64.7 49.8,65.4 49.8,70.3 v1@50.1,70.6 ; v1(59.9,11) 59.9,14.7 v1@60.1,14.9 ; v1(77,83.9) 77,85.798 C26.1@77.3,86.098 ; v1(77.1,21.3) 77.1,23.1 77.4,23.4 82.7,23.4 83.598,24.298 C36.1@83.598,26.4 ; v1@96.4,74.9 102.8,74.9 103.9,73.8 v1(103.9,70.6)
  Bottom Layer w0.6: T3.1@7.2,42.4 7.237,42.437 U2.3@12.454,42.437 ; C5.1@21.8,41 22.199,40.601 C1.1@22.199,38.2 ; v1(25.4,40.9) 25.4,41.8 25.9,42.3 31.3,42.3 31.8,42.8 v1(31.8,44) v1@31.8,44.3 ; v1@81.9,26.4 C36.1@83.598,26.4
  other v1: 96.5,74.8
VCC_13.8V: C2.1 C3.1 C20.1 C21.1 C22.1 C24.1 C33.1 C48.1 C49.1 D1.1 D3.2 D8.1 D9.1 Q2.3 R1.1 R2.2 R78.1 T2.1 U1.2 U2.1 U5.1 U6.1 U8.8 | length 304
  Top Layer w0.35: 18.3,61.4 22.7,61.4
  Top Layer w0.4: U1.2@12.429,26.046 15.5,26.046 ; D1.1@17.6,22.3 D3.2@21.4,22.3 ; R2.2@25,21.2 23.9,22.3 D3.2@21.4,22.3 ; v1(26.7,81.4) 26.738,81.438 D8.1@29.1,81.438 29.238,81.3 U5.1@32.4,81.3 ; v1(36.5,31.9) 35.8,32.6 22.8,32.6 22.2,32 C3.1@22.2,28.1 22.2,23.1 D3.2@21.4,22.3 ; Q2.3@41.163,33.318 41.163,31.837 v1(41.2,31.8) ; v1@41.8,73.7 43.1,72.4 58,72.4 59.1,73.5 71.3,73.5 72.3,72.5 74.7,72.5 78.5,76.3 v1@81.5,76.3 ; C48.1@51.1,39.1 52.3,37.9 52.3,37 ; R78.1@52.299,29.8 53.799,28.3 v1(55.3,28.3) ; R78.1@52.3,29.6 52.3,37 ; T2.1@56.2,37.5 52.8,37.5 52.3,37 ; v1(66.7,25.5) 66.7,22.112 U8.8@67.807,21.005 ; v1(101.4,81.7) 101.862,81.238 D9.1@103.5,81.238 ; D9.1@103.4,81.4 103.407,81.393 U6.1@106.795,81.393
  Top Layer w0.6: R1.1@12.05,49.9 R1.1@12.05,50 ; R1.1@12.3,50 R1.1@12.05,50 ; U1.2@12.429,26.046 12.482,26.1 16.5,26.1 16.7,26.3 16.7,30 15.8,30.9 13.6,30.9 12.454,32.046 U2.1@12.454,37.281 9.719,37.281 9.3,37.7 9.3,49.3 10,50 R1.1@12.05,50 ; 15.5,26.046 16.554,26.046 17.6,25 17.6,22.4 D1.1@17.5,22.3 ; 18.3,61.4 17.7,60.8 17.7,53.5 17,52.8 12.6,52.8 12.05,52.25 R1.1@12.05,50 ; 22.7,61.4 27.9,66.6 v1@32.9,66.6
  Bottom Layer w0.4: C2.1@21.8,30.5 22.2,30.1 C3.1@22.2,28.1 ; v1(26.7,81.4) 32.1,81.4 32.801,80.699 32.801,75.9 ; C20.1@32.5,73.8 33.098,73.202 C22.1@33.098,71.3 33.098,66.898 v1(32.9,66.7) ; C20.1@32.801,73.8 32.801,75.9 ; v1@36.3,32 36.5,31.8 v1(41.2,31.8) 48.1,31.8 51.1,34.8 C48.1@51.1,39.1 ; v1(42,73.7) 38.1,73.7 36,75.8 32.901,75.8 32.801,75.9 ; C49.1@50.7,41.6 51.1,41.2 C48.1@51.1,39.2 ; v1(55.3,28.3) 55.3,26.1 55.8,25.6 66.6,25.6 v1(66.7,25.5) ; C33.1@66.7,23.6 v1(66.7,25.5) ; v1@66.9,25.5 v1(66.7,25.5) ; v1(81.4,76.4) 83,78 98.2,78 ; v1(101.4,81.7) 98,81.7 97.4,81.1 97.4,78.8 98.2,78 ; C21.1@107.3,74.2 107.5,74.4 107.5,77.2 106.7,78 99.5,78 ; C21.1@107.4,74.6 107.698,74.302 C24.1@107.698,71.9 ; C48.1@51.1,39.1 C48.1@51.1,39.2 ; C48.1@51.1,39.1 C48.1@51.1,39.2 ; 98.2,78 99.5,78 ; 98.2,78 99.5,78
VS_24V: C14.1 C15.1 D2.1 D16.2 J1.1 J1.2 J10.1 M1.5 M2.5 pad.8@8,80.7 pad.8@8,81.8 pad.8@8,82.9 pad.8@8,84 pad.8@8.3,73.1 pad.8@8.3,74.2 pad.8@8.3,75.3 pad.8@8.3,76.4 pad.9@9.3,80.7 pad.9@9.3,81.8 pad.9@9.3,82.9 pad.9@9.3,84 pad.9@9.6,73.1 pad.9@9.6,74.2 pad.9@9.6,75.3 pad.9@9.6,76.4 pad.10@10.7,80.7 pad.10@10.7,81.8 pad.10@10.7,82.9 pad.10@10.7,84 pad.10@11,73.1 pad.10@11,74.2 pad.10@11,75.3 pad.10@11,76.4 R13.1 R40.2 | length 177.1
  Top Layer w0.4: C14.1@6.5,60.5 3.5,60.5 3.1,60.9 ; M2.5@9.3,82.7 9.639,82.361 M2.5@9.639,82.351 M1.5@9.639,74.651 M1.5@9.2,74.651 ; J1.2@15.1,5.6 J1.2@15,5.7 J1.1@10,5.7 10,11.9 ; R13.1@21.4,72.601 21.4,66.8 20.7,66.1 9.6,66.1 9.1,66.6 9.1,74.551 M1.5@9.2,74.651 ; v1(27.3,24.2) R40.2@27.3,26.001 ; J10.1@32.7,5.8 32.7,10.7 31.5,11.9 10,11.9 ; 3.1,60.9 3.1,73.2 4.551,74.651 M1.5@9.2,74.651 ; 3.1,60.9 3.1,24.5 9.438,18.162 D2.1@9.438,17.7 10,17.138 10,11.9
  Bottom Layer w0.4: C14.1@6.5,60.5 6.5,61.8 C15.1@7.9,63.2 ; D16.2@32,15.7 32.667,15.033 J10.1@32.667,5.7
  Bottom Layer w1: v1(27.3,24.2) 27.3,17.6 29.2,15.7 32,15.7 D16.2@32.338,15.7 D16.2@32.5,15.7
WOL: P2.3 U11.50 | length 127.3
  Top Layer w0.25: v1(67.8,60.4) 71.2,60.4 75.95,55.65 U11.50@77.65,55.65
  Bottom Layer w0.25: v1(67.8,60.4) 67.8,51.4 68.3,50.9 68.3,38.6 73.3,33.6 88.3,33.6 89.1,34.4 98.6,34.4 99.9,33.1 99.9,28.9 100.7,28.1 106.5,28.1 107.7,26.9 107.7,24.7 108.2,24.2 123.1,24.2 124,25.1 124,37.8 124.6,38.4 130.4,38.4 131.5,39.5 131.5,43.4 131,43.9 P2.3@129.5,43.9
pads on no net: H4.6 U11.1 U11.24 U11.27 U11.28 U11.29 U11.30 U11.31 U11.36 U11.37 U11.42 U11.54 U11.58 U11.59 U11.60 X1. X2. X3. X4. X5.

## Polygon pours and split planes (outlines as drawn)
GND on Top Layer "Top Overlay-No Net" (solid, remove dead copper): 36.2,25.7 36.2,22.1 36.4,21.9 36.6,21.7 45.2,21.7 46.6,21.7 46.7,21.8 46.8,21.9 46.8,24.8 46.8,24.9 46.3,25.4 46,25.7 36.2,25.7
NetD16_1 on Top Layer "Top Overlay-No Net" (solid, remove dead copper): 36.5,21 36.5,0.2 36.7,0 36.9,-0.2 44.4,-0.2 45.6,-0.2 46,0.2 46.7,0.9 46.7,21.2 36.7,21.2
GND on Top Layer "Top Overlay-No Net" (solid, remove dead copper): 69.4,100.5 69.4,96.1 69.3,96 69.3,94.2 69.3,92.6 69.4,92.5 69.6,92.3 70.795,92.3 71.7,92.3 72,92.6 72.3,92.9 72.3,93.5 72.3,94.2 72.4,94.3 74.3,94.3 74.8,94.3 75,94.5 75.1,94.6 75.1,99.4 75.1,99.7 74.3,100.5
BEMF_B on Top Layer "Top Overlay-No Net" (solid, remove dead copper): 110.2,101.1 118.6,101.1 118.7,101 118.9,100.8 118.9,100.4 118.9,97.5 118.4,97 117.4,96 109.9,96 109.7,96.2 109.7,100.9
NetM5_1 on Top Layer "Top Overlay-No Net" (solid, remove dead copper): 69,101.6 76.2,101.6 76.5,101.3 77.7,100.1 77.7,98.4 77.7,96 78.3,95.4 84.5,95.4 104.7,95.4 105,95.1 105.4,94.7 105.4,90.2 105.4,88.1 105.2,87.9 104.9,87.6 100.6,87.6 98.1,87.6 97.8,87.9 96.6,89.1 95.4,89.1 76.1,89.1 75.7,89.5 75.4,89.8 75.4,94.6 75.4,99.8 74.5,100.7 74.4,100.8 68.8,100.8
NetM5_1 on Top Layer "Top Overlay-No Net" (solid, remove dead copper): 41.5,87.2 37.4,87.2 37,87.6 36.7,87.9 36.7,92.5 36.7,95.6 37.3,96.2 38,95.5 38.1,95.5 62.4,95.5 62.7,95.8 63,96.1 63,100.1 63,103.6 63.4,104 63.5,104.1 65.6,104.1 68.6,104.1 68.8,103.9 69.1,103.6 69.1,97.8 69.1,92.8 68.8,92.5 65.8,92.5 64.7,92.5 63.6,91.4 62.7,90.5 51.3,90.5 41.7,90.5 41.5,90.3
BEMF_A on Top Layer "Top Overlay-No Net" (solid, remove dead copper): 62.2,109.3 67,109.3 67.2,109.1 67.9,108.4 67.9,107.4 67.9,105.5 67.6,105.2 66.9,104.5 63.4,104.5 62.3,104.5 61.8,104 61.1,104.7 60.3,104.7 60.3,109.2 60.4,109.3
BEMF_A on Top Layer "Top Overlay-No Net" (solid, remove dead copper): 21.8,100.468 21.8,93.991 22.1,93.696 22.3,93.5 33,93.5 36.5,93.5 37.1,94.089 37.2,94.187 37.2,96.64 37.2,108.613 36.8,109.006 36.5,109.3 34.5,109.3 34.4,109.3 34.1,109.006 33.9,108.809 33.9,103.706 33.9,101.842 33.3,101.253 32.8,100.762 22,100.762
NetH1_1 on Top Layer "Top Overlay-No Net" (solid, remove dead copper): 8.8,90.2 20.6,90.2 20.9,89.9 21.1,89.7 21.1,79.1 21.1,69.4 20.9,69.2 20.5,68.8 19.3,68.8 13.3,68.8 13.2,68.7 12.7,69.2 12.7,69.7 12.7,85.9 12.3,86.3 11,87.6 9.6,87.6 9.6,89.1 8.8,89.9
NetC16_1 on Top Layer "Top Overlay-No Net" (solid, remove dead copper): 9,92.25 9,103.5 9.1,103.6 10.9,105.4 12.9,105.4 21.4,105.4 21.201,105.201 21.201,101.51 21.201,91.901 20.9,91.6 10,91.6 9.2,91.6 9.1,91.7 8.8,92
NetC16_1 on Top Layer "Top Overlay-No Net" (solid, remove dead copper): 33.4,115 135.1,115 135.1,87.3 135,87.2 134.8,87 123.4,87 122.3,87 122,87.3 121.9,87.4 121.9,90.8 121.1,91.6 119.8,91.6 119.2,92.2 119,92.4 119,96.7 119,96.9 119.7,97.6 119.7,101.3 119,102 112.1,102 111.5,102 110.9,102.6 111,102.7 111,109.5 110.6,109.9 110.1,110.4 32.9,110.4 32.2,110.4 31.7,110.9 31.1,111.5 31.1,115
BEMF_B on Top Layer "Top Overlay-No Net" (solid, remove dead copper): 71,109.1 71,103.129 71.292,102.862 71.778,102.416 77.031,102.416 77.42,102.416 78.782,101.169 79.366,100.634 79.366,97.248 79.366,96.535 79.755,96.178 79.95,96 95.027,96 109.911,96 110.3,96.356 110.3,105.001 110.3,108.209 110.105,108.387 109.425,109.011 109.425,109.1 71,109.1
BEMF_A on Top Layer "Top Overlay-No Net" (solid, remove dead copper): 36.8,109.3 36.8,96.656 37.1,96.375 37.5,96 53.4,96 61.8,96 62.4,96.562 62.5,96.656 62.5,107.427 62.5,109.019 62.3,109.206 62.2,109.3 61.7,109.3
NetC16_1 on Top Layer "Top Overlay-No Net" (solid, remove dead copper): 12.7,115 12.8,114.9 12.8,102.3 12.8,102.2 13.2,101.8 13.5,101.5 30.3,101.5 31.4,101.5 32.4,102.5 33.5,103.6 33.5,115
VS_24V on Top Layer "Top Overlay-No Net" (solid, remove dead copper): 35.1,0.1 35.1,14.9 34.3,15.7 34.2,15.6 16.4,15.6 12.1,15.6 11,16.7 10.3,17.4 10.3,49.4 10.3,58.2 9.9,58.6 9.9,64.7 20.5,64.7 21.4,65.6 21.9,66.1 21.9,68.1 21.9,69.3 21.1,70.1 20.9,70.3 17.7,70.3 17.5,70.3 17.3,70.1 17.1,69.9 17.1,68.3 17.1,68.2 16.6,67.7 16.5,67.6 14.8,67.6 14,67.6 13.4,68.2 12.9,68.2 12,69.1 12.1,69.2 12.1,84 12.1,114.5 11.6,115 0.1,115 0,114.9 0,0
GND on Bottom Layer "Top Overlay-No Net" (solid, remove dead copper): 0,0 135.2,0 135.2,114.9 135.1,115 0,115

## Keep-outs
Keep-Out Layer:
  lines w0.3: 0,0 0,115 135.2,115 135.2,0 0,0

## Other copper
Top Layer:
  rectangle net GND: 40.9,22 44.3,24.7
  rectangle net NetD16_1: 37.5,15.6 45.3,20.1
  rectangle net BEMF_A: 60,105.3 63.3,109.2
  rectangle net BEMF_B: 71,105.5 75,109.1
  rectangle net BEMF_A: 36.4,108.917 36.89,109.3
  rectangle net BEMF_A: 22.2,97.665 25.035,99.2
  rectangle net GND: 82.5,70.5 85.2,72.8
  rectangle net GND: 42.1,23.3 43.4,23.7
  region net GND: 69.61,100.3 69.61,93.39 69.7,93.3 72,93.3 72,94.5 72.104,94.604 74.5,94.6 74.5,99.7 73.9,100.3
  region net NetM5_1: 67.9,104.1 68.4,104.5 68.5,107.1 68.5,109.4 68.7,109.6 70.3,109.6 70.4,109.4 70.4,103.6 70.6,101.6 70.5,101.7 67.9,101.7
  region net NetM5_1: 67.201,104.1 70.4,104.1 70.5,103.9 70.5,102.7 71,101.8 77.2,101.8 78.8,100.3 78.8,95 76.2,95 75.9,95.3 75.9,100.5 75.3,101.1 67.319,101.1 67.21,101.21
  text "DC CONT 01" at 58.3,35.1 h1.52
Bottom Layer:
  rectangle net NetC16_1: 110.5,101.7 121.2,110.6
  rectangle net BEMF_B: 81.1,96 99.3,104.1
  rectangle net GND: 70.1,95.7 74.5,100.3
  rectangle net BEMF_A: 39.8,95.8 58,103.9
  rectangle net NetC16_1: 19.3,101.8 30,110.7
  rectangle net VS_24V: 4.9,70 12,87.3

## Silkscreen, mask and mechanical layers (free items; w line width, h text height)
Top Overlay:
  rectangle: 0,12.8 135.2,14.2
Top Solder:
  rectangle: 75.4,95.4 78.8,99.8
  rectangle: 70.4,101.6 71,102.7
  rectangle: 68.4,100.7 70.5,104.5
  rectangle: 68.7,100.8 77.1,101.8
  rectangle: 14.9,107.7 18.2,114.3
  rectangle: 121.3,87 133.7,93.8
  rectangle: 1.2,9.3 8.5,17
  rectangle: 5.8,57.8 9.8,69
  rectangle: 3.5,13.2 8.5,58.6
  rectangle: 123.9,107.4 128.3,111
  rectangle: 111,101.8 121.6,110.6
  rectangle: 17.7,110.5 128.3,114.3
  rectangle: 28.3,95.2 37,99.2
  rectangle: 8.8,92.4 21.2,98.7
  rectangle: 1.3,86.8 7.3,107
  rectangle: 5.6,68.6 12.2,87.7
  rectangle: 19.9,101.5 30.4,111.2
  rectangle: 26.9,112.7 34,113.7
  rectangle: 36.6,96 58.5,109.2
  rectangle: 80.5,95.9 107,109.1
  rectangle: 122.9,91.1 131.8,106.4
  rectangle: 82.5,70.5 85.2,72.8
  region: 68.4,104.5 68,104.1 63.5,104.1 63,103.6 63,100.7 63.1,100.6 69,100.6 69.2,100.8 69.2,104.5
  region: 74.3,100.8 75.3,99.8 78.8,99.8 78.8,100.3 77.3,101.8 74.3,101.8
  lines w3: 29.4,111.7 31.7,111.7 32.5,112.5 113.4,112.5 113.5,112.4 120.6,112.4 122.8,110.2 122.8,93.2 126,90 130.4,90 132.2,91.8 132.2,104.5 130.3,106.4 123.6,106.4 123.1,106.9
  lines w5: 3.7,15 3.7,103.3 ; 13.7,95.5 15.5,95.5 17.4,97.4 17.4,107.8 20.8,111.2 28.4,111.2
Bottom Solder:
  rectangle: 110.5,101.7 121.2,110.6
  rectangle: 81.1,96 99.3,104.1
  rectangle: 39.8,95.8 58,103.9
  rectangle: 19.3,101.8 30,110.7
  rectangle: 4.9,70 12,87.3

## Text inside footprints (layer, text, board x,y; h text height)
P2: Top Overlay "10" at 127.468,52.784 h1 r90; Top Overlay "9" at 130.008,52.784 h1 r90; Top Overlay "1" at 130.008,39.068 h1 r90; Top Overlay "2" at 127.468,38.56 h1 r90